# EAGLE board Teensy + MD (EAGLE 9.6.1)
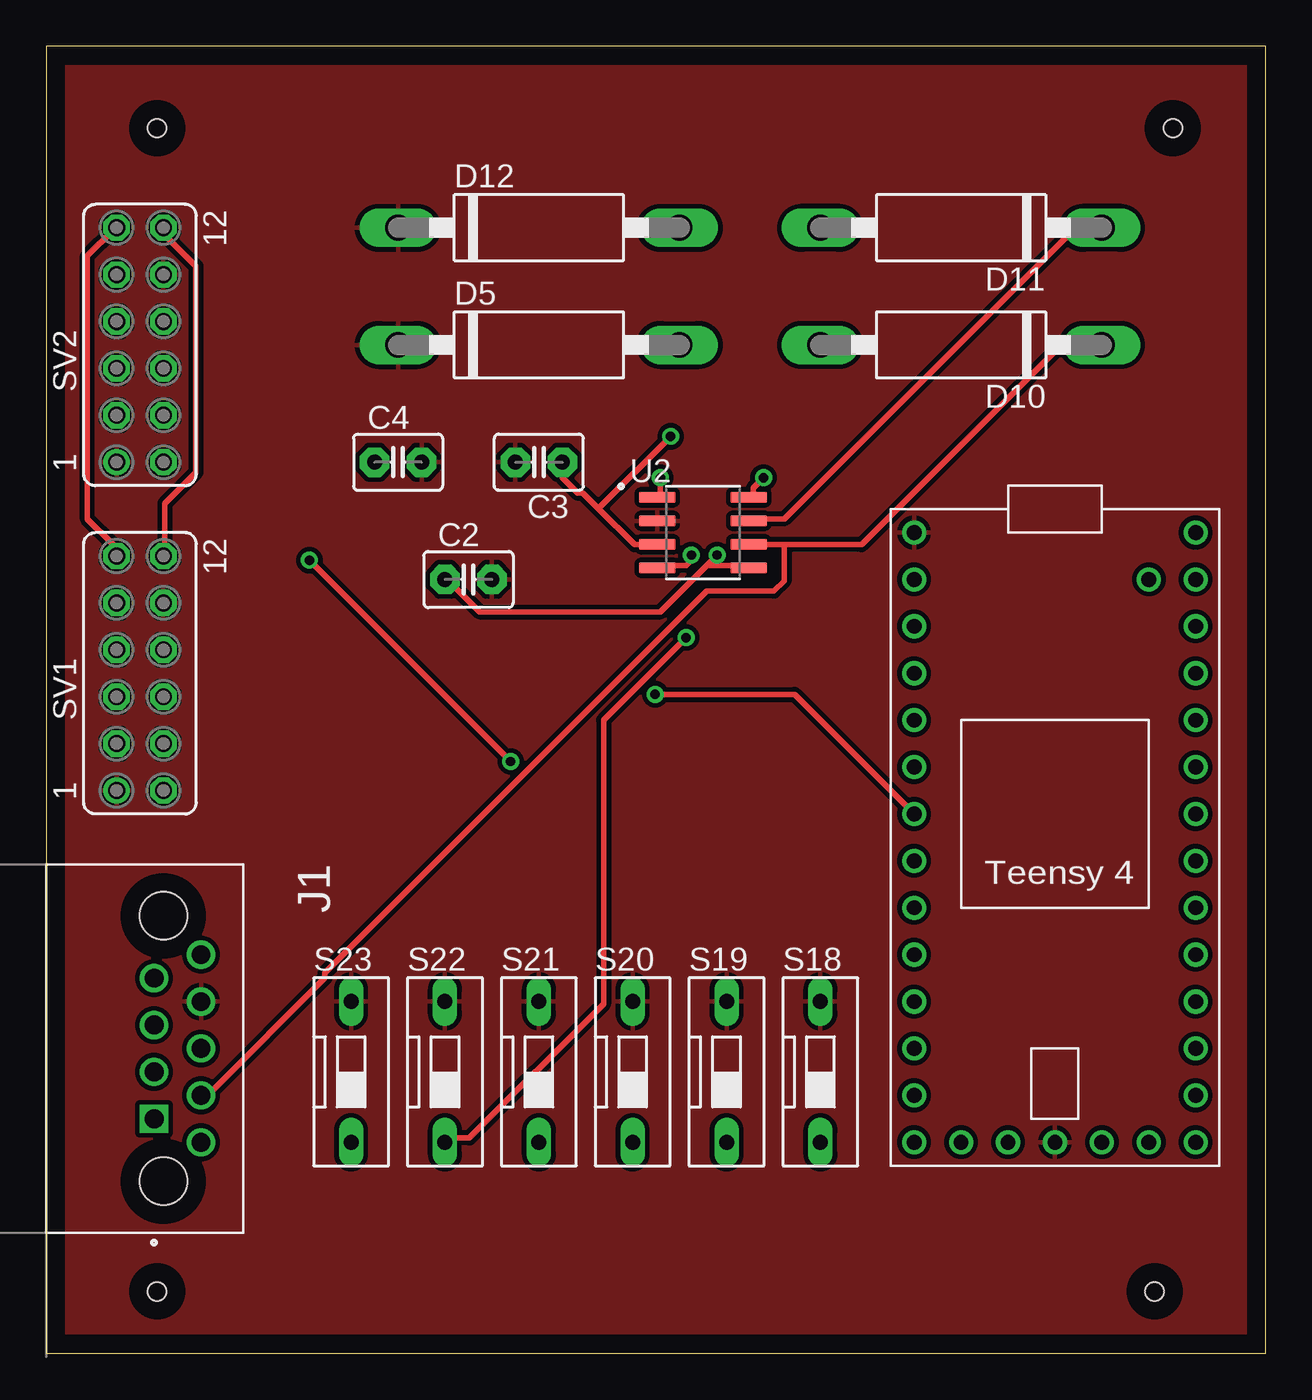
[diagram p0: board, top side]
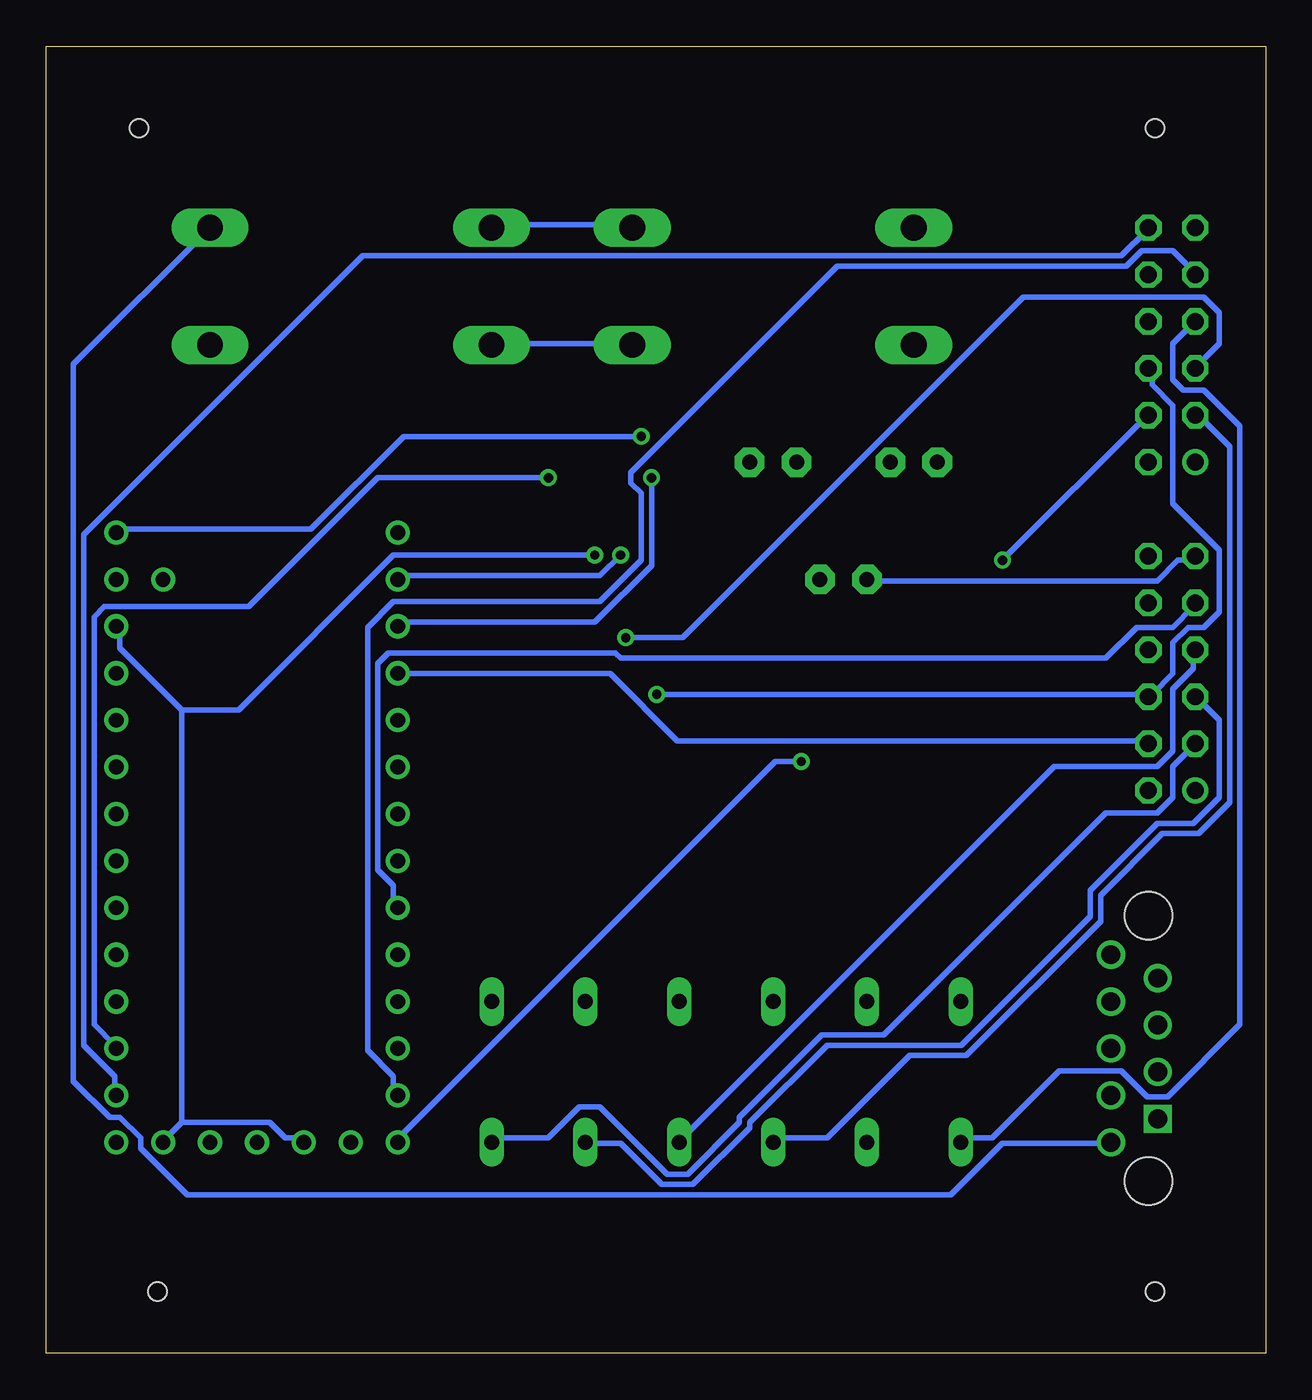
[diagram p1: board, bottom side, seen from below]

Size 66.02 x 70.79 mm. Coordinates in mm from the lower left corner, seen from the top.
Outline: 0,0 66.02,0 66.02,70.79 0,70.79 0,0
Copper layers (1*16): Top 0.035mm / dielectric 1.5mm / Bottom 0.035mm
Design rules "default": minimum track width 6mil, minimum drill 0.35mm, track to track 6mil, track to pad 6mil, pad to pad 6mil, via to via 6mil, smd to smd 6mil, copper to edge 40mil, drill to drill 6mil, minimum pad ring 10mil, minimum via ring 8mil, stop-mask expansion 4mil, vias tented up to drill 0mil, thermal gap 10mil
Net classes: 0 default: width 0.305 mm, drill 0.508 mm, clearance 0.254 mm
Holes 1 mm at 6,3.35 60,3.35 61,66.35 6,66.35

## Footprints (pad centres in the part's own frame; a part is rotated, then mirrored left to right if it is on the bottom)
C2.5-3 = drill 0.813 pad 1.6 octagon: 1 -1.27,0; 2 1.27,0
C1702-15 = drill 1.397 long: A 7.62,0; C -7.62,0
BEL_M83513/10-A01NP = drill 1.02 square: 1 3.81,-0.508 | drill 1.02: 2 1.27,-0.508; 3 0,2.032; 4 -1.27,-0.508; 5 -3.81,-0.508; 6 5.08,2.032; 7 2.54,2.032; 8 -2.54,2.032; 9 -5.08,2.032 | hole 2.57: -7.188,0; 7.188,0
DS-01 = drill 0.813 long: 1 0,-3.81; 2 0,3.81
FE06-2 = drill 0.914: 1 -6.35,1.27 | drill 0.914 octagon: 2 -6.35,-1.27; 3 -3.81,1.27; 4 -3.81,-1.27; 5 -1.27,1.27; 6 -1.27,-1.27; 7 1.27,1.27; 8 1.27,-1.27; 9 3.81,1.27; 10 3.81,-1.27; 11 6.35,1.27; 12 6.35,-1.27
SOIC127P600X175-8N = smd 1.97 x 0.59: 1 -2.475,1.905; 2 -2.475,0.635; 3 -2.475,-0.635; 4 -2.475,-1.905; 5 2.475,-1.905; 6 2.475,-0.635; 7 2.475,0.635; 8 2.475,1.905
TEENSY4.0 = drill 0.8: 3.3V@1 7.62,10.16; 3.3V@2 -2.54,-17.78; AGND 7.62,12.7; D0 -7.62,12.7; D1 -7.62,10.16; D2 -7.62,7.62; D3 -7.62,5.08; D4 -7.62,2.54; D5 -7.62,0; D6 -7.62,-2.54; D7 -7.62,-5.08; D8 -7.62,-7.62; D9 -7.62,-10.16; D10 -7.62,-12.7; D11 -7.62,-15.24; D12 -7.62,-17.78; D13/LED 7.62,-17.78; D14/A0 7.62,-15.24; D15/A1 7.62,-12.7; D16/A2 7.62,-10.16; D17/A3 7.62,-7.62; D18/A4 7.62,-5.08; D19/A5 7.62,-2.54; D20/A6 7.62,0; D21/A7 7.62,2.54; D22/A8 7.62,5.08; D23/A9 7.62,7.62; GND@1 -7.62,15.24; GND@2 0,-17.78; ON/OFF 5.08,-17.78; PROGRAM 2.54,-17.78; VBAT -5.08,-17.78; VIN 7.62,15.24; VUSB 5.08,12.7

## Placement (x,y rotation side)
C2  [C2.5-3]  22.86,41.91 0 top
C3  0.1uF  [C2.5-3]  26.67,48.26 180 top
C4  4.7nF  [C2.5-3]  19.05,48.26 0 top
D5  1N5333  [C1702-15]  26.67,54.61 0 top
D10  1N5333  [C1702-15]  49.53,54.61 180 top
D11  1N5333  [C1702-15]  49.53,60.96 180 top
D12  1N5333  [C1702-15]  26.67,60.96 0 top
J1  M83513/10-A01NP  [BEL_M83513/10-A01NP]  6.35,16.51 270 top
S18  [DS-01]  41.91,15.24 0 top
S19  [DS-01]  36.83,15.24 0 top
S20  [DS-01]  31.75,15.24 0 top
S21  [DS-01]  26.67,15.24 0 top
S22  [DS-01]  21.59,15.24 0 top
S23  [DS-01]  16.51,15.24 0 top
SV1  [FE06-2]  5.08,36.83 90 top
SV2  [FE06-2]  5.08,54.61 90 top
U2  MAX13054ASA  [SOIC127P600X175-8N]  35.56,44.45 0 top
U$3  TEENSY4.0  [TEENSY4.0]  54.61,29.21 0 top

## Library data of the parts
C2-C4 = capacitor-wima
D5 D10-D12 = diode
J1 = M83513_10-A01NP; AVAILABILITY: Unavailable; DESCRIPTION: MIL-DTL-83513 PCB Mounted Connector | Plug | 9 Positions | Shell Finish - Nickel | Male | PCB Solder Pins | 0.109 (2.77 mm) Pin Length | Jackpost Attached; MF: Cinch Connectivity Solutions; MP: M83513/10-A01NP; PACKAGE: None; PRICE: None
S18-S23 = switch-dil; OC_FARNELL: unknown; OC_NEWARK: unknown
SV1 SV2 = con-lsta; OC_FARNELL: unknown; OC_NEWARK: unknown
U2 = MAX13054ASA; DESCRIPTION: 1/1 Transceiver Full CANbus 8-SOIC; DIGI-KEY_PART_NUMBER: MAX13054ASA+TTR-ND; DIGI-KEY_PURCHASE_URL: https://www.digikey.com/product-detail/en/maxim-integrated/MAX13054ASA-T/MAX13054ASA-TTR-ND/1475460?utm_source=snapeda&utm_medium=aggregator&utm_campaign=symbol; MF: Maxim Integrated; MP: MAX13054ASA+; PACKAGE: SOIC-8 Maxim
U$3 = Teensy4.0

## Nets
+3V3: C2.1 SV1.11 SV2.11 U2.5 U$3.3.3V@1 U$3.3.3V@2 U$3.ON/OFF
CAN_BUS: D11.C J1.6 U2.7
GND: C2.2 C3.2 C4.2 D5.C D12.C J1.8 S18.2 S19.2 S20.2 S21.2 S22.2 S23.2 SV1.1 SV1.10 SV2.1 SV2.10 U2.2 U$3.GND@1 U$3.GND@2
MD1.5V: SV1.6 SV2.6 U$3.D5
MD1.FR: SV1.9 U$3.D7
MD1.PG: SV1.4 U$3.D2
MD1.X1: S20.1 SV1.7
MD1.X2: S19.1 SV1.5
MD1.X3: S18.1 SV1.3
MD2.BK: SV1.12 SV2.12 U$3.D14/A0
MD2.FR: SV2.9 U$3.D11
MD2.PG: SV2.4 U$3.D12
MD2.X1: S23.1 SV2.7
MD2.X2: S22.1 SV2.5
MD2.X3: S21.1 SV2.3
N$9: D10.C J1.7 U2.6
N$10: U2.8 U$3.D15/A1
N$11: U2.4 U$3.D0
N$12: U2.1 U$3.D1
N$13: C4.1
N$14: D5.A D10.A
N$15: D11.A D12.A
VCC: C3.1 U2.3 U$3.VIN

## Tracks (layer width: path | path; a pad name or v marks a point on that pad's centre or on a via)
+3V3  (via drill 0.51)
  Top 0.305: 35.76,42.67 38,42.67 U2.5 | 35.76,42.67 33.25,40.16 23.47,40.16 21.79,41.83 C2.1 | SV2.11 3.63,60.83 2.23,59.44 2.23,45.19 3.63,43.79 3.63,43.23 SV1.11 | 35.76,42.67 v36.32,43.23
  Bottom 0.305: 58.67,12.5 53.92,12.5 53.09,11.66 52.25,11.66 U$3.3.3V@2 | 58.67,12.5 59.51,11.66 U$3.ON/OFF | 58.67,34.85 62.03,38.2 62.03,39.32 U$3.3.3V@1 | 58.67,12.5 58.67,34.85 | SV1.11 3.91,42.95 4.75,42.95 5.87,41.83 21.51,41.83 C2.1 | 58.67,34.85 55.6,34.85 47.22,43.23 v36.32,43.23
CAN_BUS
  Top 0.305: U2.7 38.28,45.19 39.95,45.19 55.6,60.83 57,60.83 D11.C
  Bottom 0.305: D11.C 64.54,53.57 64.54,14.73 62.59,12.78 62.03,12.78 60.91,11.66 60.91,11.1 58.4,8.58 17.04,8.58 14.25,11.38 8.38,11.38 J1.6
GND
  pour Top: -1.27,72.39 -1.27,-1.27 67.31,-1.27 67.31,72.39
MD1.5V  (via drill 0.51)
  Top 0.305: U$3.D5 40.51,35.69 v32.97,35.69
  Bottom 0.305: v32.97,35.69 6.43,35.69 SV1.6 6.15,35.69 5.03,36.8 5.03,38.48 4.19,39.32 3.35,39.32 2.52,40.16 2.52,43.51 5.03,46.02 5.03,51.33 6.15,52.45 6.15,53.29 SV2.6
MD1.FR
  Bottom 0.305: U$3.D7 47.22,24.23 47.22,25.35 48.06,26.19 48.06,37.36 47.5,37.92 35.2,37.92 34.92,37.64 8.66,37.64 6.99,39.32 5.03,39.32 3.91,40.44 SV1.9
MD1.PG
  Bottom 0.305: U$3.D2 46.94,36.8 35.48,36.8 31.85,33.17 6.43,33.17 SV1.4
MD1.X1
  Bottom 0.305: S20.1 31.57,11.66 11.46,31.77 5.87,31.77 5.03,32.61 5.03,35.97 3.91,37.08 3.91,37.92 SV1.7
MD1.X2
  Bottom 0.305: S19.1 36.6,11.38 34.92,11.38 32.69,9.14 31.01,9.14 27.94,12.22 27.94,12.5 23.75,16.69 16.48,16.69 9.5,23.67 9.5,25.07 5.87,28.7 3.91,28.7 2.52,30.1 2.52,34.29 3.63,35.41 SV1.5
MD1.X3
  Bottom 0.305: S18.1 41.91,11.66 38.84,11.66 37.16,13.34 36.04,13.34 32.41,9.7 31.29,9.7 28.5,12.5 28.5,12.78 24.03,17.25 20.68,17.25 8.66,29.26 5.87,29.26 5.03,30.1 5.03,31.77 3.91,32.89 SV1.3
MD2.BK
  Top 0.305: SV1.12 6.43,43.23 6.43,46.02 8.1,47.7 8.1,58.88 6.15,60.83 SV2.12
  Bottom 0.305: U$3.D14/A0 62.31,14.17 62.31,15.01 63.98,16.69 63.98,44.35 48.9,59.44 7.82,59.44 6.43,60.83 SV2.12
MD2.FR
  Bottom 0.305: U$3.D11 47.22,14.17 47.22,15.01 48.62,16.41 48.62,39.32 47.22,40.72 36.04,40.72 33.81,42.95 33.81,46.58 34.37,47.14 34.37,47.7 23.19,58.88 7.54,58.88 6.71,59.72 5.03,59.72 3.91,58.6 SV2.9
MD2.PG  (via drill 0.51)
  Top 0.305: v14.25,42.95 v25.15,32.05
  Bottom 0.305: v25.15,32.05 26.54,32.05 46.94,11.66 U$3.D12 | v14.25,42.95 6.43,50.77 SV2.4
MD2.X1
  Bottom 0.305: S23.1 16.48,11.66 14.81,11.66 11.18,15.29 7.82,15.29 6.43,13.89 5.31,13.89 1.4,17.8 1.4,50.22 3.35,52.17 4.47,52.17 5.03,52.73 5.03,54.69 3.91,55.8 SV2.7
MD2.X2  (via drill 0.51)
  Top 0.305: v34.65,38.76 30.18,34.29 30.18,18.92 22.91,11.66 21.79,11.66 S22.1
  Bottom 0.305: v34.65,38.76 31.57,38.76 13.13,57.2 3.35,57.2 2.52,56.36 2.52,54.69 3.63,53.57 SV2.5
MD2.X3
  Bottom 0.305: S21.1 26.54,11.66 23.75,11.66 19.28,16.13 16.2,16.13 8.94,23.39 8.94,24.79 5.59,28.14 3.63,28.14 1.96,29.82 1.96,49.1 3.63,50.77 SV2.3
N$9
  Top 0.305: 39.95,43.79 44.15,43.79 54.76,54.41 57,54.41 D10.C | 39.95,43.79 38.28,43.79 U2.6 | 39.95,43.79 39.95,41.83 39.4,41.27 35.76,41.27 15.09,20.6 15.09,20.32 8.94,14.17 8.38,14.17 J1.7
N$10  (via drill 0.51)
  Top 0.305: v38.84,47.42 38.28,46.86 38.28,46.58 U2.8
  Bottom 0.305: v38.84,47.42 48.06,47.42 55.04,40.44 62.87,40.44 63.42,39.88 63.42,17.8 62.31,16.69 U$3.D15/A1
N$11  (via drill 0.51)
  Top 0.305: v34.92,43.23 34.92,42.95 34.65,42.67 33.25,42.67 U2.4
  Bottom 0.305: v34.92,43.23 36.04,42.11 46.94,42.11 U$3.D0
N$12  (via drill 0.51)
  Top 0.305: v33.25,47.42 33.25,46.58 U2.1
  Bottom 0.305: v33.25,47.42 33.25,42.67 36.32,39.6 46.94,39.6 U$3.D1
N$14
  Bottom 0.305: D5.A 34.37,54.69 41.91,54.69 D10.A
N$15
  Bottom 0.305: D12.A 34.37,61.11 41.91,61.11 D11.A
VCC  (via drill 0.51)
  Top 0.305: 29.9,45.75 29.06,46.58 28.78,46.58 27.94,47.42 C3.1 | 29.9,45.75 31.85,43.79 32.97,43.79 U2.3 | 29.9,45.75 v33.81,49.66
  Bottom 0.305: v33.81,49.66 46.66,49.66 51.69,44.63 62.03,44.63 U$3.VIN